# EAGLE board Amplificador (EAGLE 9.6.2)
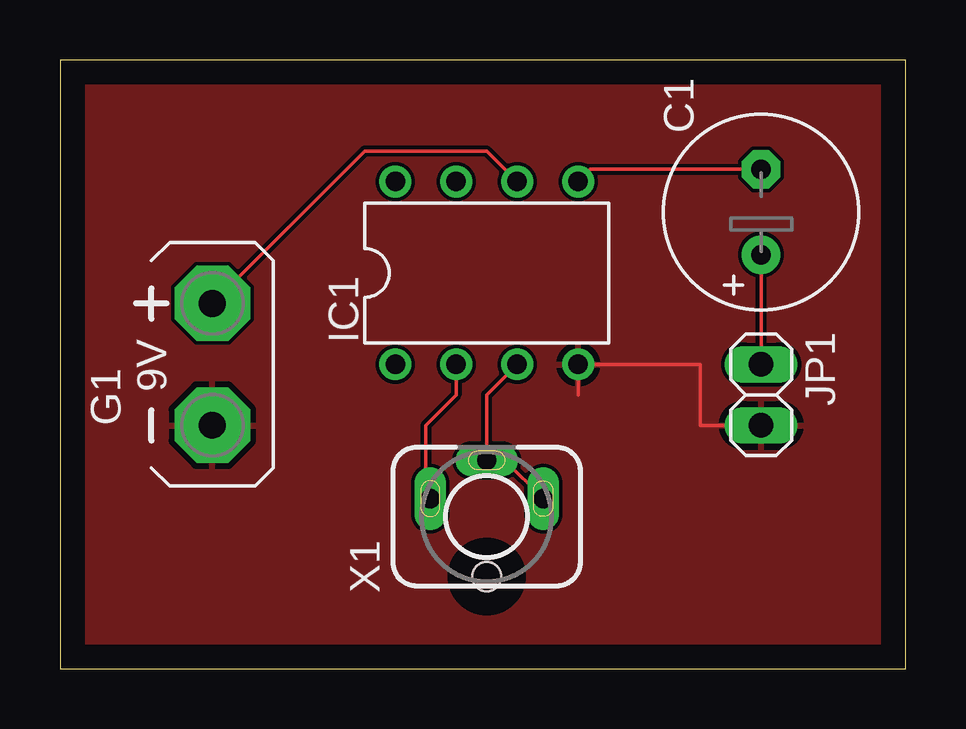
[diagram p0: board, top side]
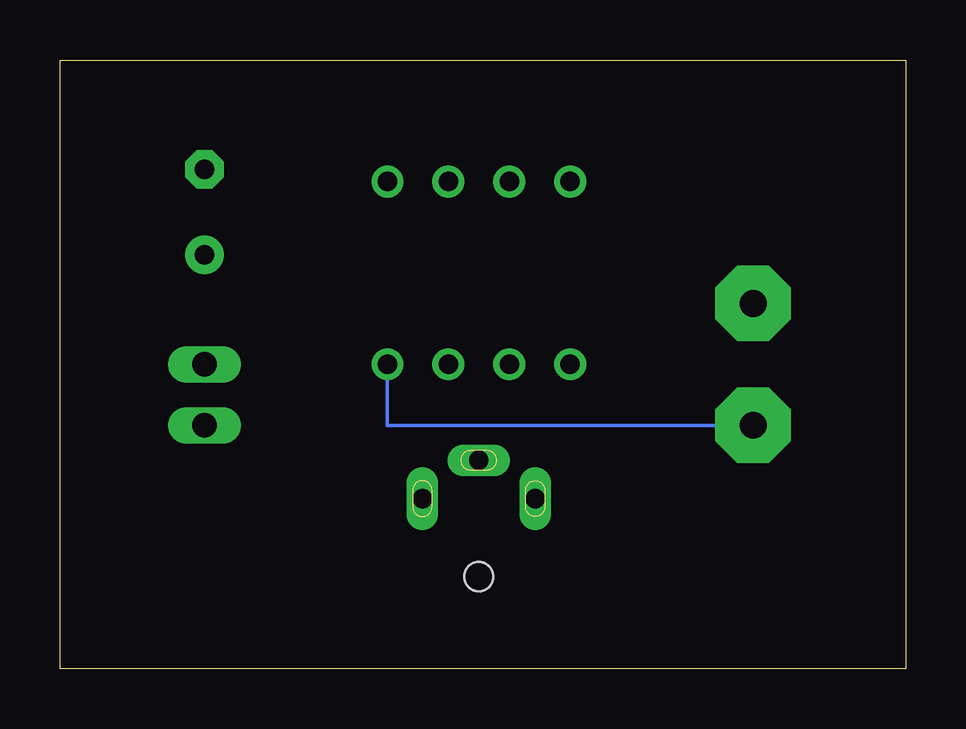
[diagram p1: board, bottom side, seen from below]

Size 35.23 x 25.39 mm. Coordinates in mm from the lower left corner, seen from the top.
Outline: 0,0 35.23,0 35.23,25.39 0,25.39 0,0
Copper layers (1*16): Top 0.035mm / dielectric 1.5mm / Bottom 0.035mm
Design rules "default": minimum track width 6mil, minimum drill 0.35mm, track to track 6mil, track to pad 6mil, pad to pad 6mil, via to via 6mil, smd to smd 6mil, copper to edge 40mil, drill to drill 6mil, minimum pad ring 10mil, minimum via ring 8mil, stop-mask expansion 4mil, vias tented up to drill 0mil, thermal gap 10mil

## Footprints (pad centres in the part's own frame; a part is rotated, then mirrored left to right if it is on the bottom)
E3,5-8 = drill 0.813 pad 1.6: + -1.778,0 | drill 0.813 pad 1.6 octagon: - 1.778,0
AB9V = drill 1.118 pad 3.15 octagon: + 0,2.54; - 0,-2.54
DIL08 = drill 0.813 pad 1.27: 1 -3.81,-3.81; 2 -1.27,-3.81; 3 1.27,-3.81; 4 3.81,-3.81; 5 3.81,3.81; 6 1.27,3.81; 7 -1.27,3.81; 8 -3.81,3.81
1X02 = drill 1.016 long: 1 -1.27,0; 2 1.27,0
1502_01 = drill 0.8 pad 1.2 long: 1 0,2.35; 2 -2.35,0.75; 3 2.35,0.75 | hole 1.2: 0,-2.5

## Placement (x,y rotation side)
C1  220uf/16v  [E3,5-8]  29.21,19.05 90 top
G1  AB9V  [AB9V]  6.35,12.7 0 top
IC1  LM386N-1  [DIL08]  17.78,16.51 0 top
JP1  [1X02]  29.21,11.43 270 top
X1  1502_01  [1502_01]  17.78,6.35 0 top

## Library data of the parts
C1 = rcl; SPICEPREFIX: C
G1 = battery
IC1 = linear
JP1 = pinhead
X1 = con-lumberg; OC_FARNELL: 4739747; OC_NEWARK: unknown

## Nets
GND: G1.- IC1.4 JP1.2
N$1: IC1.2 X1.2
N$2: IC1.3 X1.1 X1.3
N$3: G1.+ IC1.6
N$4: C1.- IC1.5
N$5: C1.+ JP1.1

## Tracks (layer width: path | path; a pad name or v marks a point on that pad's centre or on a via)
GND
  Top 0.152: 21.59,11.43 IC1.4 26.67,12.7 26.67,10.16 JP1.2
  Bottom 0.152: G1.- 21.59,10.16 IC1.4
  pour Top: -2.54,27.94 35.56,27.94 39.37,24.13 39.37,1.27 35.56,-2.54 0,-2.54 -2.54,0 -2.54,25.4
N$1
  Top 0.152: IC1.2 16.51,11.43 15.24,10.16 15.24,7.29 X1.2
N$2
  Top 0.152: X1.3 18.53,8.7 X1.1 17.78,11.43 IC1.3
N$3
  Top 0.152: IC1.6 17.78,21.59 12.7,21.59 G1.+
N$4
  Top 0.152: IC1.5 22.1,20.83 C1.-
N$5
  Top 0.152: JP1.1 C1.+